# Altium PCB STM32F446RE_BES.PcbDoc
Units mil, origin at the board's own origin, x right, y up, seen from the top; angles counter-clockwise.
Board outline 6000 x 4000 mil, 2 copper layers (Top Layer, Bottom Layer); 61 components, 78 nets, 302 pads, 0 vias.
Unrouted connection lines stored in the file: 203.
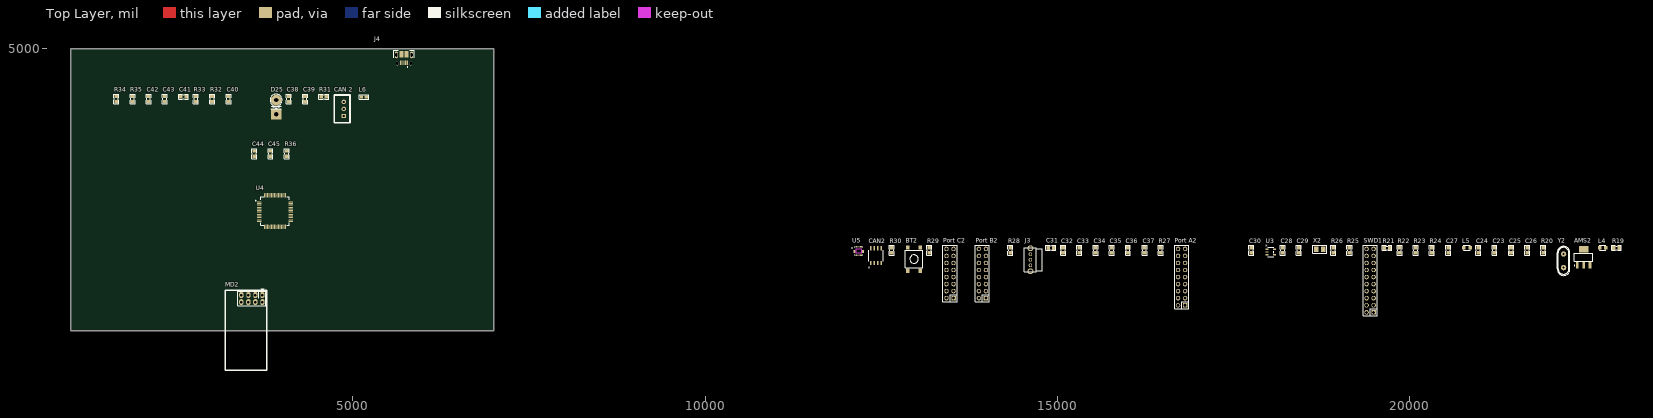
[diagram p0: Top Layer view]
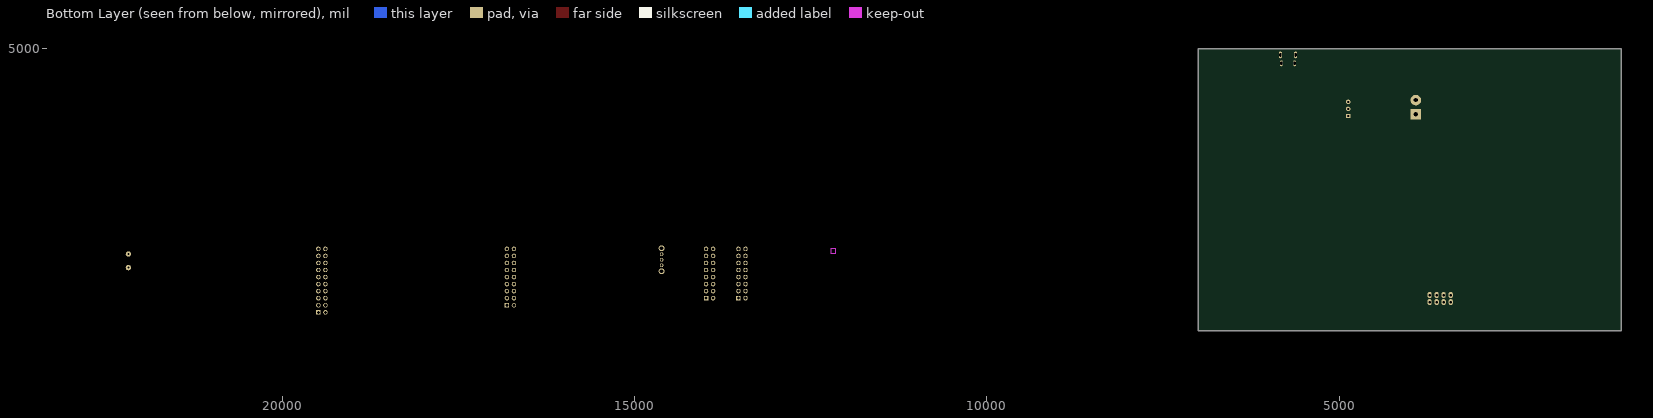
[diagram p1: Bottom Layer view, seen from below]

## Layer stack, top to bottom
Top Solder: solder mask 0.4, Solder Resist, Dk 3.5
Top Layer: signal copper 1.4
Dielectric 1: dielectric 12.6, FR-4, Dk 4.8
Bottom Layer: signal copper 1.4
Bottom Solder: solder mask 0.4, Solder Resist, Dk 3.5

## Board outline
1000,1000 7000,1000 7000,5000 1000,5000

## Design rules (kind name [scope] priority, off if disabled: settings)
Clearance [All] p1: gap=10 ignorepadtopadclearanceinfootprint=FALSE except(0: Arc-Hole Track-Hole SMDPad-Hole THPad-Hole Via-Hole Fill-Hole Poly-Hole Region-Hole Text-Hole)
PolygonConnect [All] p1: connectstyle=Relief reliefconductorwidth=10 reliefentries=4 polygonreliefangle="90 Angle" airgapwidth=10
RoomDefinition "STM32F446xx Schematic design" [InComponentClass('STM32F446xx Schematic design')] p1: confinementstyle=ConfineIn formatcopy=TRUE lockcomponents=FALSE outline 7045,2390 22125,2390 22125,3670 7045,3670
RoomDefinition STM32F446RE_BES [InComponentClass('STM32F446RE_BES')] p2: confinementstyle=ConfineIn formatcopy=TRUE lockcomponents=FALSE outline 7035,1040 23035,1040 23035,2320 7035,2320
RoutingVias [All] p1: holewidth=28 width=50 viastyle="Through Hole" minholewidth=28 minwidth=50 maxholewidth=28 maxwidth=50
SolderMaskExpansion [All] p1: expansion=4 istentingtop=FALSE
Width [All] p1: maxlimit=10 minlimit=10 preferedwidth=10
30 further rules are at their usual default settings.

## Components (designator, comment, footprint, x,y, rotation, side; value= is the part's Value field where it differs from the comment)
AMS2 "AMS1117-3.3V" SOT223 22465,2040 r0 top value="AMS1117-3.3V SOT223"
BT2 "Nut Nhan 4 Chan SMD 6x6" "Nut Nhan 4 Chan SMD 6x6" 12965,2015 r90 top
C23 "2.2uF" "tu 0805" 21200,2140 r90 top
C24 "2.2uF" "tu 0805" 20970,2140 r90 top
C25 "2.2uF" "tu 0805" 21435,2140 r90 top
C26 "2.2uF" "tu 0805" 21665,2140 r90 top
C27 "2.2uF" "tu 0805" 20545,2140 r90 top
C28 "12pF" "tu 0805" 18195,2140 r90 top
C29 "12pF" "tu 0805" 18425,2140 r90 top
C30 "10nF" "tu 0805" 17750,2140 r90 top
C31 "100nF" "tu 0805" 14905,2175 r0 top
C32 "100nF" "tu 0805" 15080,2140 r90 top
C33 "100nF" "tu 0805" 15310,2140 r90 top
C34 "100nF" "tu 0805" 15540,2140 r90 top
C35 "100nF" "tu 0805" 15770,2140 r90 top
C36 "100nF" "tu 0805" 16000,2140 r90 top
C37 "2.2uF" "tu 0805" 16235,2140 r90 top
C38 "10nF" "tu 0805" 4095,4285 r90 top
C39 "10nF" "tu 0805" 4325,4285 r90 top
C40 "100nF" "tu 0805" 3240,4285 r90 top
C41 "10nF" "tu 0805" 2600,4320 r0 top
C42 "100nF" "tu 0805" 2105,4285 r90 top
C43 "100nF" "tu 0805" 2335,4285 r90 top
C44 "560pF" "tu 0805" 3605,3510 r90 top
C45 "560pF" "tu 0805" 3835,3510 r90 top
CAN2 "CAN 2" SOIC127P599X175-8N 12425,2065 r90 top
"CAN 2" "CAN Transceiver" XH2.54M-3 4875,4045 r90 top
D25 "Diode" D5AN 3915,4070 r90 top value=1N5007
J3 "SK12D07VG4" SK12D07VG4 14615,2005 r90 top
J4 "10103594-0001LF" AMPHENOL_10103594-0001LF 5728.82,4911.22 r180 top
L4 "LED 0805" LED-0805-Green 22690,2175 r0 top
L5 "LED 0805" LED-0805-Red 20765,2175 r0 top
L6 "120R" "IND-0603 (1608)" 5160,4315 r0 top value=23R/4A
MD2 "NRF24L01 Module" NRF24L01 3720,1505 r180 top
"Port A2" "Port A" "JP 2x9 DT" 16760,1760 r90 top
"Port B2" "Port B" "JP 2x8 DT" 13935,1810 r90 top
"Port C2" "Port C" "JP 2x8 DT" 13475,1810 r90 top
R19 "1M" "tro smd 0805" 22930,2175 r0 top
R20 "1k" "tro smd 0805" 21890,2140 r90 top
R21 "10K" "tro smd 0805" 19675,2175 r0 top
R22 "10K" "tro smd 0805" 19850,2140 r90 top
R23 "10K" "tro smd 0805" 20080,2140 r90 top
R24 "10K" "tro smd 0805" 20310,2140 r90 top
R25 "1k" "tro smd 0805" 19140,2140 r90 top
R26 "10K" "tro smd 0805" 18910,2140 r90 top
R27 "10k" "tro smd 0805" 16460,2140 r90 top
R28 "10k" "tro smd 0805" 14330,2140 r90 top
R29 "10k" "tro smd 0805" 13180,2140 r90 top
R30 "4k7" "tro smd 0805" 12645,2140 r90 top
R31 "20R" "tro smd 0805" 4590,4320 r0 top
R32 "120R" "tro smd 0805" 3005,4285 r90 top
R33 "20R" "tro smd 0805" 2775,4285 r90 top
R34 "100R" "tro smd 0805" 1645,4285 r90 top
R35 "100R" "tro smd 0805" 1875,4285 r90 top
R36 "4.7K" "tro smd 0805" 4065,3510 r90 top
SWD1 "SWD" "JP 2x10 DT" 19435,1710 r90 top
U3 "MIC5225-1.8YM5-TR" SOT-23-5_M5_MCH 18025,2115 r0 top
U4 "STM32F446RET6" QFP50P1200X1200X160-64N 3900,2695 r0 top
U5 "ICM-20948" QFN40P300X300X105-24N 12180,2130 r0 top
X2 "32.768KHz" Crystal_ABS07_SMD-3.2x1.5MM 18720,2155 r0 top
Y2 "16Mhz" "Thach Anh 2 chan cam" 22180,1990 r90 top value=4Mhz

## Footprints (in the part's own frame and the unit in brackets; to place one, negate y for a bottom-side part, rotate by r counter-clockwise, add the part's x,y. Pads: shape width x height; smd on the part's side, far side on the other; paste and mask are expansions set on the pad)
AMPHENOL_10103594-0001LF [mm]
  rect 0.4x1.75 smd: 1(-1.3,2.825) 2(-0.65,2.825) 3(0,2.825) 4(0.65,2.825) 5(1.3,2.825)
  oval 0.73x1.46 hole 0.65 slot 1.05 at 90 deg mask+0: 6(-2.425,3.03) 7(2.425,3.03)
  oval 1.2x2.4 hole 0.7 slot 1.2 at 90 deg: 8(-2.725,0) 9(2.725,0)
  oval 1.05x2.1 smd far side paste-2: 10(-2.425,3.03) 11(2.425,3.03)
  rect 1.425x2.5 smd: S1(-0.962,-0.25) S2(0.962,-0.25)
  silkscreen extent -3.75,-1.7 3.75,4.5, body extent -4.02,-4.15 4.02,1.88, height 2.95
Crystal_ABS07_SMD-3.2x1.5MM [mm] "Crystal 3.2x1.5mm"
  rect 1.65x2 smd: 1(-1.3,0) 2(1.3,0)
  silkscreen extent -2.49,-1.37 2.46,1.38, body extent -1.6,-0.75 1.6,0.75, height 0.81
D5AN [mil] "Diode 5A, W 200mil, L 250mil"
  round 150 hole 60: 1(200,0)
  rect 150x150 hole 60: 2(0,0)
  silkscreen extent 81,-85 285,85, body extent 21,-74 189,31, height 252
"IND-0603 (1608)" [mm] "Resistor, Chip; 1.60 mm L X 0.80 mm W X 0.50 mm H body"
  rect 1.1x1 smd mask+0.1: 1(-0.85,0) 2(0.85,0)
  silkscreen extent -1.71,-0.81 1.71,0.81, body extent -0.92,-0.56 0.92,0.56, height 0.9
"JP 2x8 DT" [mm] "16 pins, dual pin, straight, gold plating"
  rect 1.6x1.6 hole 1.1: 1(-8.89,-1.27)
  round 1.6 hole 1.1: 2(-6.35,-1.27) 3(-3.81,-1.27) 4(-1.27,-1.27) 5(1.27,-1.27) 6(3.81,-1.27) 7(6.35,-1.27) 8(8.89,-1.27) 9(8.89,1.27) 10(6.35,1.27) 11(3.81,1.27) 12(1.27,1.27) 13(-1.27,1.27) 14(-3.81,1.27) 15(-6.35,1.27) 16(-8.89,1.27)
  silkscreen extent -10.16,-2.54 10.16,2.54, body extent -10.16,-2.54 10.16,2.54, height 8.55
"JP 2x9 DT" [mm] "18 pins, dual pin, straight, gold plating"
  rect 1.6x1.6 hole 1.1: 1(-10.16,-1.27)
  round 1.6 hole 1.1: 2(-7.62,-1.27) 3(-5.08,-1.27) 4(-2.54,-1.27) 5(0,-1.27) 6(2.54,-1.27) 7(5.08,-1.27) 8(7.62,-1.27) 9(10.16,-1.27) 10(10.16,1.27) 11(7.62,1.27) 12(5.08,1.27) 13(2.54,1.27) 14(0,1.27) 15(-2.54,1.27) 16(-5.08,1.27) 17(-7.62,1.27) 18(-10.16,1.27)
  silkscreen extent -11.43,-2.54 11.43,2.54, body extent -11.43,-2.54 11.43,2.54, height 8.55
"JP 2x10 DT" [mm] "20 pins, dual pin, straight, gold plating"
  rect 1.6x1.6 hole 1.1: 1(-11.43,-1.27)
  round 1.6 hole 1.1: 2(-8.89,-1.27) 3(-6.35,-1.27) 4(-3.81,-1.27) 5(-1.27,-1.27) 6(1.27,-1.27) 7(3.81,-1.27) 8(6.35,-1.27) 9(8.89,-1.27) 10(11.43,-1.27) 11(11.43,1.27) 12(8.89,1.27) 13(6.35,1.27) 14(3.81,1.27) 15(1.27,1.27) 16(-1.27,1.27) 17(-3.81,1.27) 18(-6.35,1.27) 19(-8.89,1.27) 20(-11.43,1.27)
  silkscreen extent -12.7,-2.54 12.7,2.54, body extent -12.7,-2.54 12.7,2.54, height 8.55
LED-0805-Green [mil]
  rect 50x55 smd: 1(0,0) 2(90,0)
  silkscreen extent 0,-35 90,35, body extent 5,-25 85,25, height 43
LED-0805-Red [mil]
  rect 50x55 smd: 1(0,0) 2(90,0)
  silkscreen extent 0,-35 90,35, body extent 5,-25 85,25, height 43
NRF24L01 [mil]
  oval 60x86 hole 36: 1(0,0) 2(0,100) 3(99,0) 4(100,100) 5(198,0) 6(199.5,100) 7(299,0) 8(300,100)
  silkscreen extent -63,-86 530,1069, body extent -73,-74 518,1068, height 588
"Nut Nhan 4 Chan SMD 6x6" [mil] "SW SMD button 4pin, 250 x250 mil"
  rect 60x50 smd: 1(-165,90) 2(165,-90) 3(165,90) 4(-165,-90)
  silkscreen extent -125,-125 125,125, body extent -180,-125 180,125, height 130
QFN40P300X300X105-24N [mm]
  rrect25% 0.64x0.22 smd: 1(-1.545,1) 2(-1.545,0.6) 3(-1.545,0.2) 4(-1.545,-0.2) 5(-1.545,-0.6) 6(-1.545,-1) 13(1.545,-1) 14(1.545,-0.6) 15(1.545,-0.2) 16(1.545,0.2) 17(1.545,0.6) 18(1.545,1)
  rrect25% 0.22x0.64 smd: 7(-1,-1.545) 8(-0.6,-1.545) 9(-0.2,-1.545) 10(0.2,-1.545) 11(0.6,-1.545) 12(1,-1.545) 19(1,1.545) 20(0.6,1.545) 21(0.2,1.545) 22(-0.2,1.545) 23(-0.6,1.545) 24(-1,1.545)
  Keep-Out Layer region: 0.85,-0.77 -0.85,-0.77 -0.85,0.77 0.85,0.77
  silkscreen extent -2.5,-1.5 1.5,1.5
QFP50P1200X1200X160-64N [mm]
  rrect50% 1.56x0.28 smd: 1(-5.68,3.75) 2(-5.68,3.25) 3(-5.68,2.75) 4(-5.68,2.25) 5(-5.68,1.75) 6(-5.68,1.25) 7(-5.68,0.75) 8(-5.68,0.25) 9(-5.68,-0.25) 10(-5.68,-0.75) 11(-5.68,-1.25) 12(-5.68,-1.75) 13(-5.68,-2.25) 14(-5.68,-2.75) 15(-5.68,-3.25) 16(-5.68,-3.75) 33(5.68,-3.75) 34(5.68,-3.25) 35(5.68,-2.75) 36(5.68,-2.25) 37(5.68,-1.75) 38(5.68,-1.25) 39(5.68,-0.75) 40(5.68,-0.25) 41(5.68,0.25) 42(5.68,0.75) 43(5.68,1.25) 44(5.68,1.75) 45(5.68,2.25) 46(5.68,2.75) 47(5.68,3.25) 48(5.68,3.75)
  rrect50% 0.28x1.56 smd: 17(-3.75,-5.68) 18(-3.25,-5.68) 19(-2.75,-5.68) 20(-2.25,-5.68) 21(-1.75,-5.68) 22(-1.25,-5.68) 23(-0.75,-5.68) 24(-0.25,-5.68) 25(0.25,-5.68) 26(0.75,-5.68) 27(1.25,-5.68) 28(1.75,-5.68) 29(2.25,-5.68) 30(2.75,-5.68) 31(3.25,-5.68) 32(3.75,-5.68) 49(3.75,5.68) 50(3.25,5.68) 51(2.75,5.68) 52(2.25,5.68) 53(1.75,5.68) 54(1.25,5.68) 55(0.75,5.68) 56(0.25,5.68) 57(-0.25,5.68) 58(-0.75,5.68) 59(-1.25,5.68) 60(-1.75,5.68) 61(-2.25,5.68) 62(-2.75,5.68) 63(-3.25,5.68) 64(-3.75,5.68)
  silkscreen extent -7.1,-5.1 5.1,5.1
SK12D07VG4 [mm]
  round 1.308 hole 0.8: 1(-2,0) 2(2,0) COM(0,0)
  round 2.1 hole 1.4: M1(-4.15,0) M2(4.15,0)
  silkscreen extent -4.4,-4.2 4.4,2.2
SOIC127P599X175-8N [mm]
  rrect25% 1.58x0.6 smd: 1(-2.67,1.905) 2(-2.67,0.635) 3(-2.67,-0.635) 4(-2.67,-1.905) 5(2.67,-1.905) 6(2.67,-0.635) 7(2.67,0.635) 8(2.67,1.905)
  silkscreen extent -4.35,-2.52 1.99,2.6, body extent -3,-2.45 3,2.45, height 1.75
SOT223 [mm]
  rect 1x2.4 smd: 1(-2.3,-2.9) 2(0,-2.9) 3(2.3,-2.9)
  rect 3.3x2.4 smd: 4(0,2.9)
  silkscreen extent -3.47,-3.02 3.35,1.4, body extent -3.25,-3.56 3.25,3.4, height 1.68
SOT-23-5_M5_MCH [mil]
  rect 38.5x20 smd paste+0 mask+0: 1(-53.75,37.4) 2(-53.75,0) 3(-53.75,-37.4) 4(53.75,-37.4) 5(53.75,37.4)
  silkscreen extent -40,-64 40,64, body extent -59,-59 59,59, height 51
"Thach Anh 2 chan cam" [mm]
  round 1.905 hole 0.8: 1(-2.45,0) 2(2.45,0)
  silkscreen extent -5.28,-2.29 5.21,2.29, body extent -5.68,-2.36 5.68,2.29, height 3.5
"tro smd 0805" [mm]
  rect 1.2x1.4 smd: 1(-0.946,-0.061) 2(0.954,-0.061)
  silkscreen extent -1.75,-0.97 1.75,0.84, body extent -1.56,-0.76 1.44,0.64, height 0.53
"tu 0805" [mm] "Compoment SMD 80x50mil"
  rect 1.2x1.4 smd: 1(-0.946,-0.003) 2(0.954,-0.003)
  silkscreen extent -1.75,-0.89 1.75,0.89, body extent -1.01,-0.64 1.01,0.63, height 0.61
XH2.54M-3 [mm]
  rect 1.6x1.6 hole 0.8: 1(0,0)
  round 1.6 hole 0.8: 2(2.54,0) 3(5.08,0)
  silkscreen extent -2.48,-2.26 7.56,3.46, body extent -2.48,-2.26 7.56,3.48, height 6.91

## Part data
AMS2: library part "AMS1117 SMD", "Dán", Chung_Loai=Dán, Don_Vi=Con, Ma_Hang=MH000596
BT2: "Nut Nhan 4 Chan 6.2x6.2x3.5", Ma_Hang=MH002424, Ten="Nút Nhấn 4 Chân 6.2x6.2x3.1MM SMD"
C23 C24 C25 C26 C27 C28 C29 C31 C32 C33 C34 C35 C36 C37: library part "Tu 0805 10pF 50V 10%", "Dán", Chung_Loai=Dán, Don_Vi=Con, Ma_Hang=MH004554, So_Chan=2, Ten_Linh_Kien="Tụ 0805 10P 10% 50V"
C30 C38 C39 C40 C41 C42 C43 C44 C45: library part "Tu 0805 106 16V 10%", "Dán", Chung_Loai=Dán, Don_Vi=Con, Ma_Hang=MH004553, So_Chan=2, Ten_Linh_Kien="Tụ 0805 106-10uF 10% 16V"
CAN2: library part MCP2551-I/SN, Package=None, Availability=Unavailable, MF="{'manufacturer': u'Microchip Technology'}", MP=MCP2551-I/SN, Price=None
"CAN 2": library part "Header 3P 2.54 Duc Thang", "Cắm", Chung_Loai=Cắm, Don_Vi=Con, Ma_Hang=MH001292, Ten_Linh_Kien="Header 3P XH2.54-3P Đực Thẳng"
D25: "Default Diode", Code - JEDEC=DO-214-AB, Published=8-Jun-2000, Publisher="Altium Limited", Revision="July-2002: Re-released for DXP Platform."
J3: "Switch Slide ON ON SPDT Side Slide 0.3A 30VDC PC Pins Bracket Mount/Through Hole Bulk", Package=None, Availability="Not in stock", Check_prices=https://www.snapeda.com/parts/SK12D07VG4/C&K/view-part/6618061/?ref=eda, MF=C&K, MP=SK12D07VG4, Price=None, SnapEDA_Link=https://www.snapeda.com/parts/SK12D07VG4/C&K/view-part/6618061/?ref=snap
J4: "USB - micro B USB 2.0 Receptacle Connector 5 Position Surface Mount, Right Angle; Through Hole", Package=None, Availability=Unavailable, MF="{'manufacturer': u'FCI Connectors'}", MP=10103594-0001LF, Price=None
L4: library part "LED 0805 Xanh La", "Dán", Chung_Loai=Dán, Don_Vi=Con, Ma_Hang=MH002326, Ten_Linh_Kien="LED 0805 Màu Xanh Lá (Green)"
L5: library part "LED 0805 Do", "Dán", Chung_Loai=Dán, Don_Vi=Con, Ma_Hang=MH000897, Ten_Linh_Kien="LED 0805 Màu Đỏ (Red)"
L6: library part FBMJ1608HM230NT, "IND-FERRITE BEAD 23 OHM  4A 0603 1LN", Category="FERRITE BEAD", CompanyID=VT-01060, MPN=FBMJ1608HM230NT, PinCount=2, Solder=SMT
"Port A2": library part "JP 2x9 2.54 Duc Thang", "Cắm", Chung_Loai=Cắm, Don_Vi=Con, Ma_Hang=MH002686, Ten_Linh_Kien="Jump Đôi Đực 2.54MM 2x40P Thẳng 11MM"
"Port B2" "Port C2": library part "JP 2x8 2.54 Duc Thang", "Cắm", Chung_Loai=Cắm, Don_Vi=Con, Ma_Hang=MH002686, Ten_Linh_Kien="Jump Đôi Đực 2.54MM 2x40P Thẳng 11MM"
R19 R20 R25 R27 R28 R29: library part "Tro 0805 1% 1k", "Dán", Chung_Loai=Dán, Don_Vi=Con, Ma_Hang=MH005468, So_Chan=2, Ten_Linh_Kien="Trở 0805 1% 1k"
R21 R22 R23 R24 R26 R30 R31 R32 R33 R34 R35 R36: library part "Tro 0805 1% 10k", "Dán", Chung_Loai=Dán, Don_Vi=Con, Ma_Hang=MH005473, So_Chan=2, Ten_Linh_Kien="Trở 0805 1% 10k"
SWD1: library part "JP 2x10 2.54 Duc Thang", "Cắm", Chung_Loai=Cắm, Don_Vi=Con, Ma_Hang=MH002686, Ten_Linh_Kien="Jump Đôi Đực 2.54MM 2x40P Thẳng 11MM"
U3: "No Description Available", Mfr_Name=Microchip, RefDes=RefDes, Type=Type
U4: "MCU 32-Bit STM32 ARM Cortex M4 RISC 512KB Flash 2.5V/3.3V 64-Pin LQFP Tray", Package=None, Availability=Unavailable, MF="{'manufacturer': u'STMicroelectronics'}", MP=STM32F446RET6, Price=None
U5: "Accelerometer, Gyroscope, Magnetometer, 9 Axis Sensor IÂ²C, SPI Output", Package=None, Availability=Unavailable, MP=ICM-20948, Price=None
X2: library part ABS07-32.768KHZ-T, "CRYSTAL 32.7680KHZ 12.5pF SMD", Category=CRYSTAL, CompanyID=VT-01153, MPN=ABS07-32.768KHZ-T, Solder=SMT
Y2: library part "Thach Anh 2 chan Cam", "Crystal For all Crystal 2pin."

## Nets (pads, with @x,y where several pads share a name; then routed paths per layer and width w, separated by ;. In a path a pad name is that pad's centre, name@x,y a point inside that pad or via, vN(x,y) a via of type N, cw(c..) or ccw(c..) an arc to the next point about the centre after c; other vN are vias at no path point)
+1.8V: C38.1 C39.1 U3.5 U5.8 U5.13
+3.3V: AMS2.2 AMS2.4 C24.1 C27.2 C30.1 C31.1 C32.1 C33.1 C34.1 C35.1 C36.1 C37.1 C40.1 CAN2.3 L4.1 MD2.2 R21.2 R22.2 R23.2 R24.2 R27.1 R29.1 R36.2 SWD1.1 SWD1.20 U3.1 U3.3 U4.1 U4.13 U4.19 U4.30 U4.32 U4.48 U4.64
+5V: "Port A2.18" AMS2.3 C23.1 C42.1 L6.1
Boot: J3.2 R27.2
CANH: "CAN 2.3" CAN2.7 R32.2 R34.2
CANL: "CAN 2.2" CAN2.6 R32.1 R35.2
GND: "CAN 2.1" "Port A2.17" "Port B2.9" "Port C2.8" AMS2.1 BT2.2 BT2.4 C23.2 C24.2 C25.2 C26.2 C27.1 C28.2 C29.2 C30.2 C31.2 C32.2 C33.2 C34.2 C35.2 C36.2 C37.2 C38.2 C39.2 C40.2 C41.2 C42.2 C43.2 C44.2 C45.2 CAN2.2 J4.5 MD2.1 R20.2 R25.1 R26.1 R28.2 R30.1 SWD1.11 SWD1.12 SWD1.13 SWD1.14 SWD1.15 SWD1.16 SWD1.17 SWD1.18 SWD1.19 U3.2 U4.12 U4.18 U4.31 U4.47 U4.63 U5.11 U5.18 U5.20
IMU_CS: "Port A2.5" U4.20 U5.22
IMU_INT: "Port A2.4" D25.2 U4.17
MCU/Boot: J3.COM U4.60
MCU/OSC32_IN: C28.1 U4.3 X2.1
MCU/OSC32_OUT: C29.1 U4.4 X2.2
MCU/OSC_IN: C25.1 R19.1 U4.5 Y2.1
MCU/OSC_OUT: C26.1 R19.2 U4.6 Y2.2
MCU/PA0/Analog_IN0: "Port A2.1" MD2.4 U4.14
MCU/PA1/Analog_IN1: "Port A2.2" MD2.8 U4.15
MCU/PA2/Analog_IN2: "Port A2.3" MD2.3 U4.16
MCU/PA5/Analog_IN5/TIM2_CH1: "Port A2.6" MD2.5 U4.21 U5.9
MCU/PA6/Analog_IN6/TIM3_CH1: "Port A2.7" MD2.7 U4.22 U5.24
MCU/PA7/Analog_IN7/TIM3_CH2: "Port A2.8" MD2.6 U4.23 U5.23
MCU/PA8/TIM1_CH1: "Port A2.9" U4.41
MCU/PA9/TIM1_CH2: "Port A2.16" U4.42
MCU/PA10/TIM1_CH3: "Port A2.15" U4.43
MCU/PA11/TIM1_CH4: "Port A2.14" R31.2 U4.44
MCU/PA12: "Port A2.13" R33.2 R36.1 U4.45
MCU/PA13: "Port A2.12" L5.1 R26.2 SWD1.4 U4.46
MCU/PA14: "Port A2.11" R22.1 SWD1.5 U4.49
MCU/PA15: "Port A2.10" R23.1 SWD1.3 U4.50
MCU/PB0/Analog_IN8/TIM3_CH3: "Port B2.1" U4.26
MCU/PB1/Analog_IN9/TIM3_CH4: "Port B2.2" U4.27
MCU/PB2/TIM2_CH4: "Port B2.3" U4.28
MCU/PB3/TIM2_CH2: "Port B2.4" R21.1 SWD1.7 U4.55
MCU/PB4: "Port B2.5" R24.1 SWD1.2 U4.56
MCU/PB5: "Port B2.6" U4.57
MCU/PB6: "Port B2.7" U4.58
MCU/PB7: "Port B2.8" U4.59
MCU/PB8: "Port B2.16" U4.61
MCU/PB9: "Port B2.15" U4.62
MCU/PB10/TIM2_CH3: "Port B2.14" U4.29
MCU/PB12/CAN_Rx: "Port B2.13" CAN2.4 U4.33
MCU/PB13/CAN_Tx: "Port B2.12" CAN2.1 U4.34
MCU/PB14: "Port B2.11" U4.35
MCU/PB15: "Port B2.10" U4.36
MCU/PC0/Analog_IN10: "Port C2.1" U4.8
MCU/PC1/Analog_IN11: "Port C2.2" U4.9
MCU/PC2/Analog_IN12: "Port C2.3" U4.10
MCU/PC3/Analog_IN13: "Port C2.4" U4.11
MCU/PC4/Analog_IN14: "Port C2.5" U4.24
MCU/PC5/Analog_IN15: "Port C2.6" U4.25
MCU/PC6: "Port C2.7" U4.37
MCU/PC7: "Port C2.16" U4.38
MCU/PC8: "Port C2.15" U4.39
MCU/PC9: "Port C2.14" U4.40
MCU/PC10: "Port C2.13" U4.51
MCU/PC11: "Port C2.12" U4.52
MCU/PC12: "Port C2.11" U4.53
MCU/PC13: "Port C2.10" U4.2
MCU/PD2: "Port C2.9" U4.54
NetC11_2: 
NetC12_1: 
NetC13_1: 
NetC41_1: C41.1 U5.10
NetC44_1: C44.1 R34.1
NetC45_1: C45.1 R35.1
NetCAN1_8: 
NetCAN2_8: CAN2.8 R30.2
NetD25_1: D25.1 U5.12
NetJ2_2: 
NetJ2_3: 
NetJ4_2: J4.2 R31.1
NetJ4_3: J4.3 R33.1
NetL2_2: 
NetL3_2: 
NetL4_2: L4.2 R20.1
NetL5_2: L5.2 R25.2
NRST: BT2.1 BT2.3 R29.2 SWD1.8 U4.7
Operate: J3.1 R28.1
VCC: C43.1 J4.1 L6.2
pads on no net: CAN2.5 J3.M1 J3.M2 J4.4 J4.6 J4.7 J4.8 J4.9 J4.10 J4.11 J4.S1 J4.S2 SWD1.6 SWD1.9 SWD1.10 U3.4 U5.1 U5.2 U5.3 U5.4 U5.5 U5.6 U5.7 U5.14 U5.15 U5.16 U5.17 U5.19 U5.21

## Text inside footprints (layer, text, board x,y; h text height)
J4: Mechanical 13 "PCB EDGE" at 5551.65,4970.28 h32 r180
U3: Top Overlay "*" at 17948.75,2167.4 h50; Mechanical 13 "*" at 17988,2124.4 h50